# Altium PCB PCB3.PcbDoc
Units mil, origin at the board's own origin, x right, y up, seen from the top; angles counter-clockwise.
Board outline 1655 x 2290 mil, 2 copper layers (Top Layer, Bottom Layer); 19 components, 11 nets, 40 pads, 0 vias.
Unrouted connection lines stored in the file: 10.
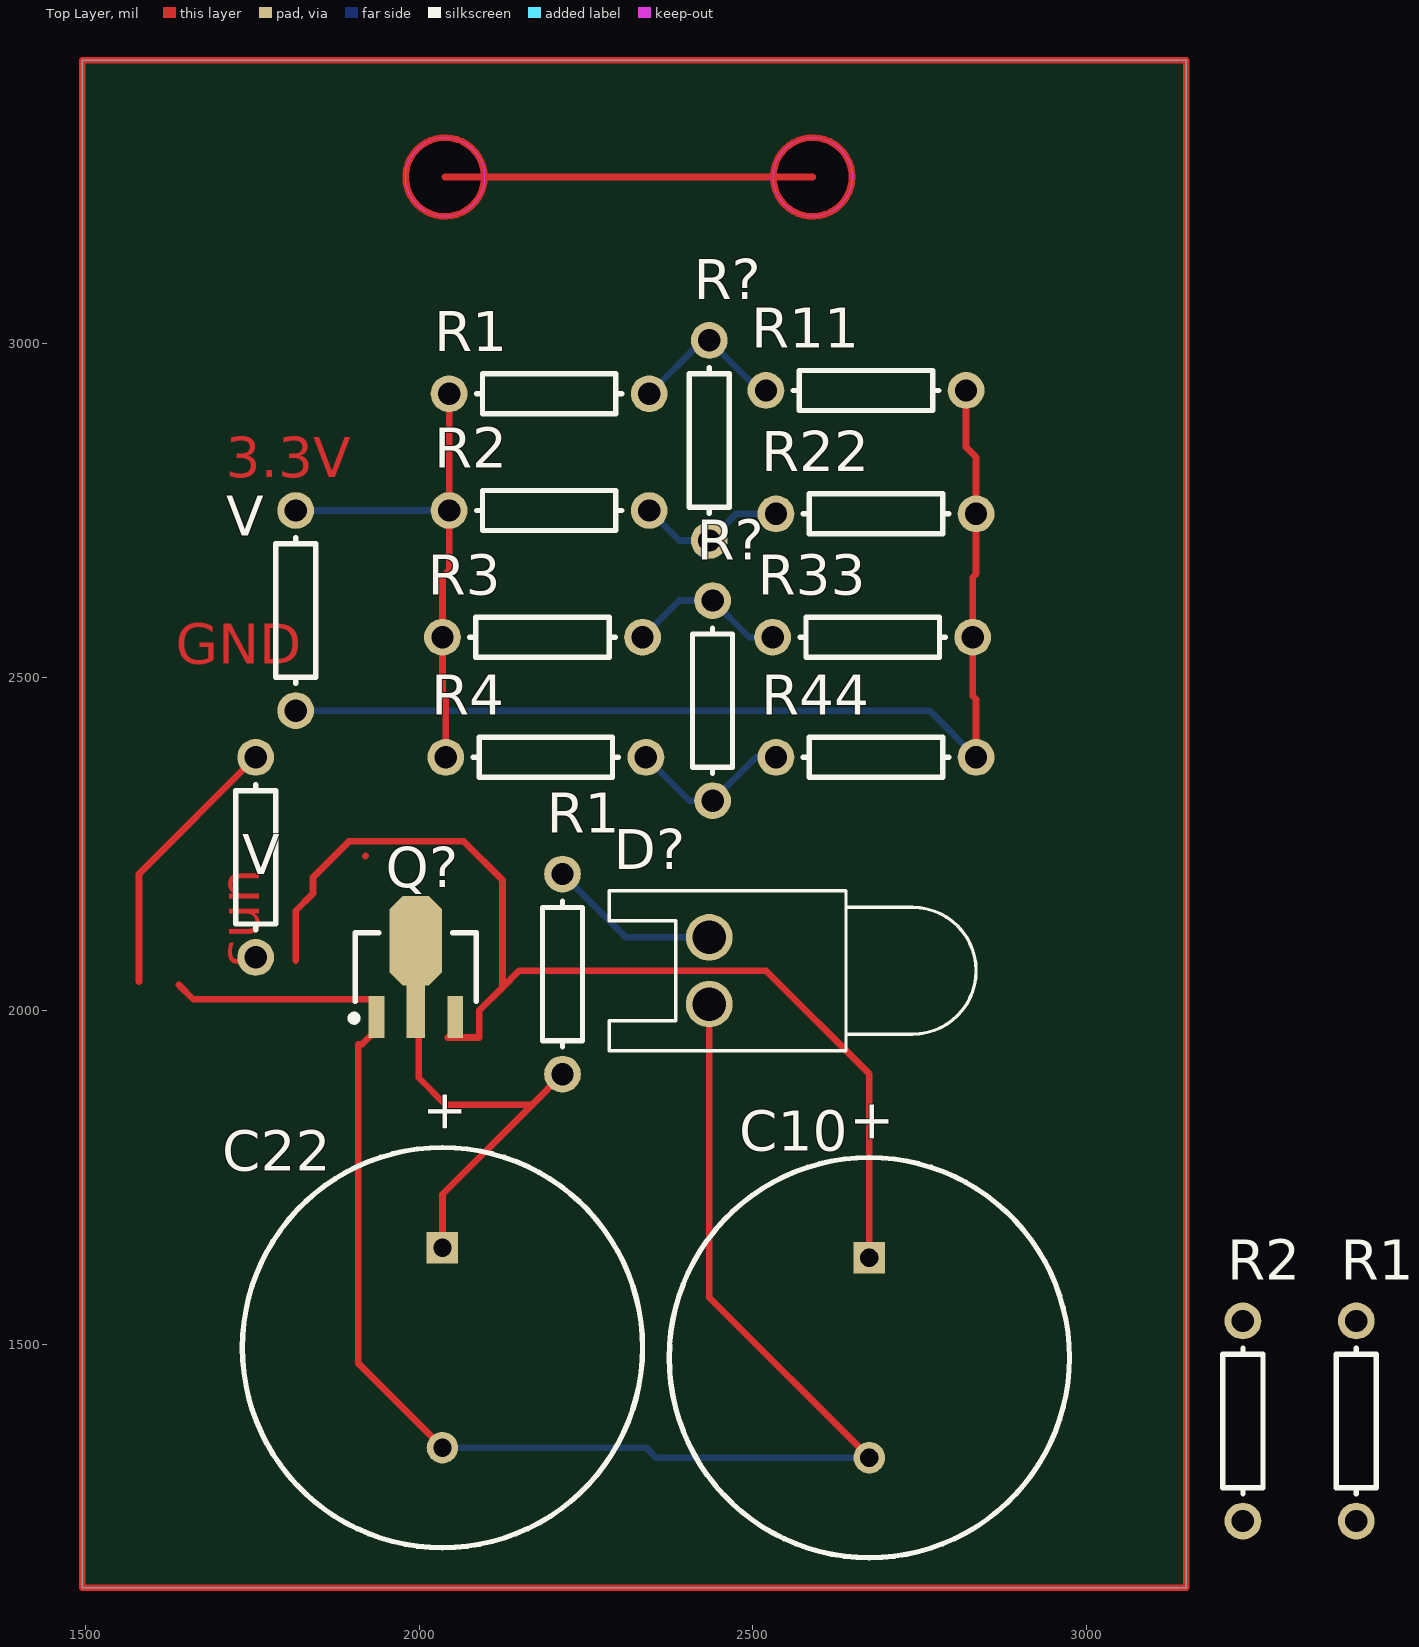
[diagram p0: Top Layer view]
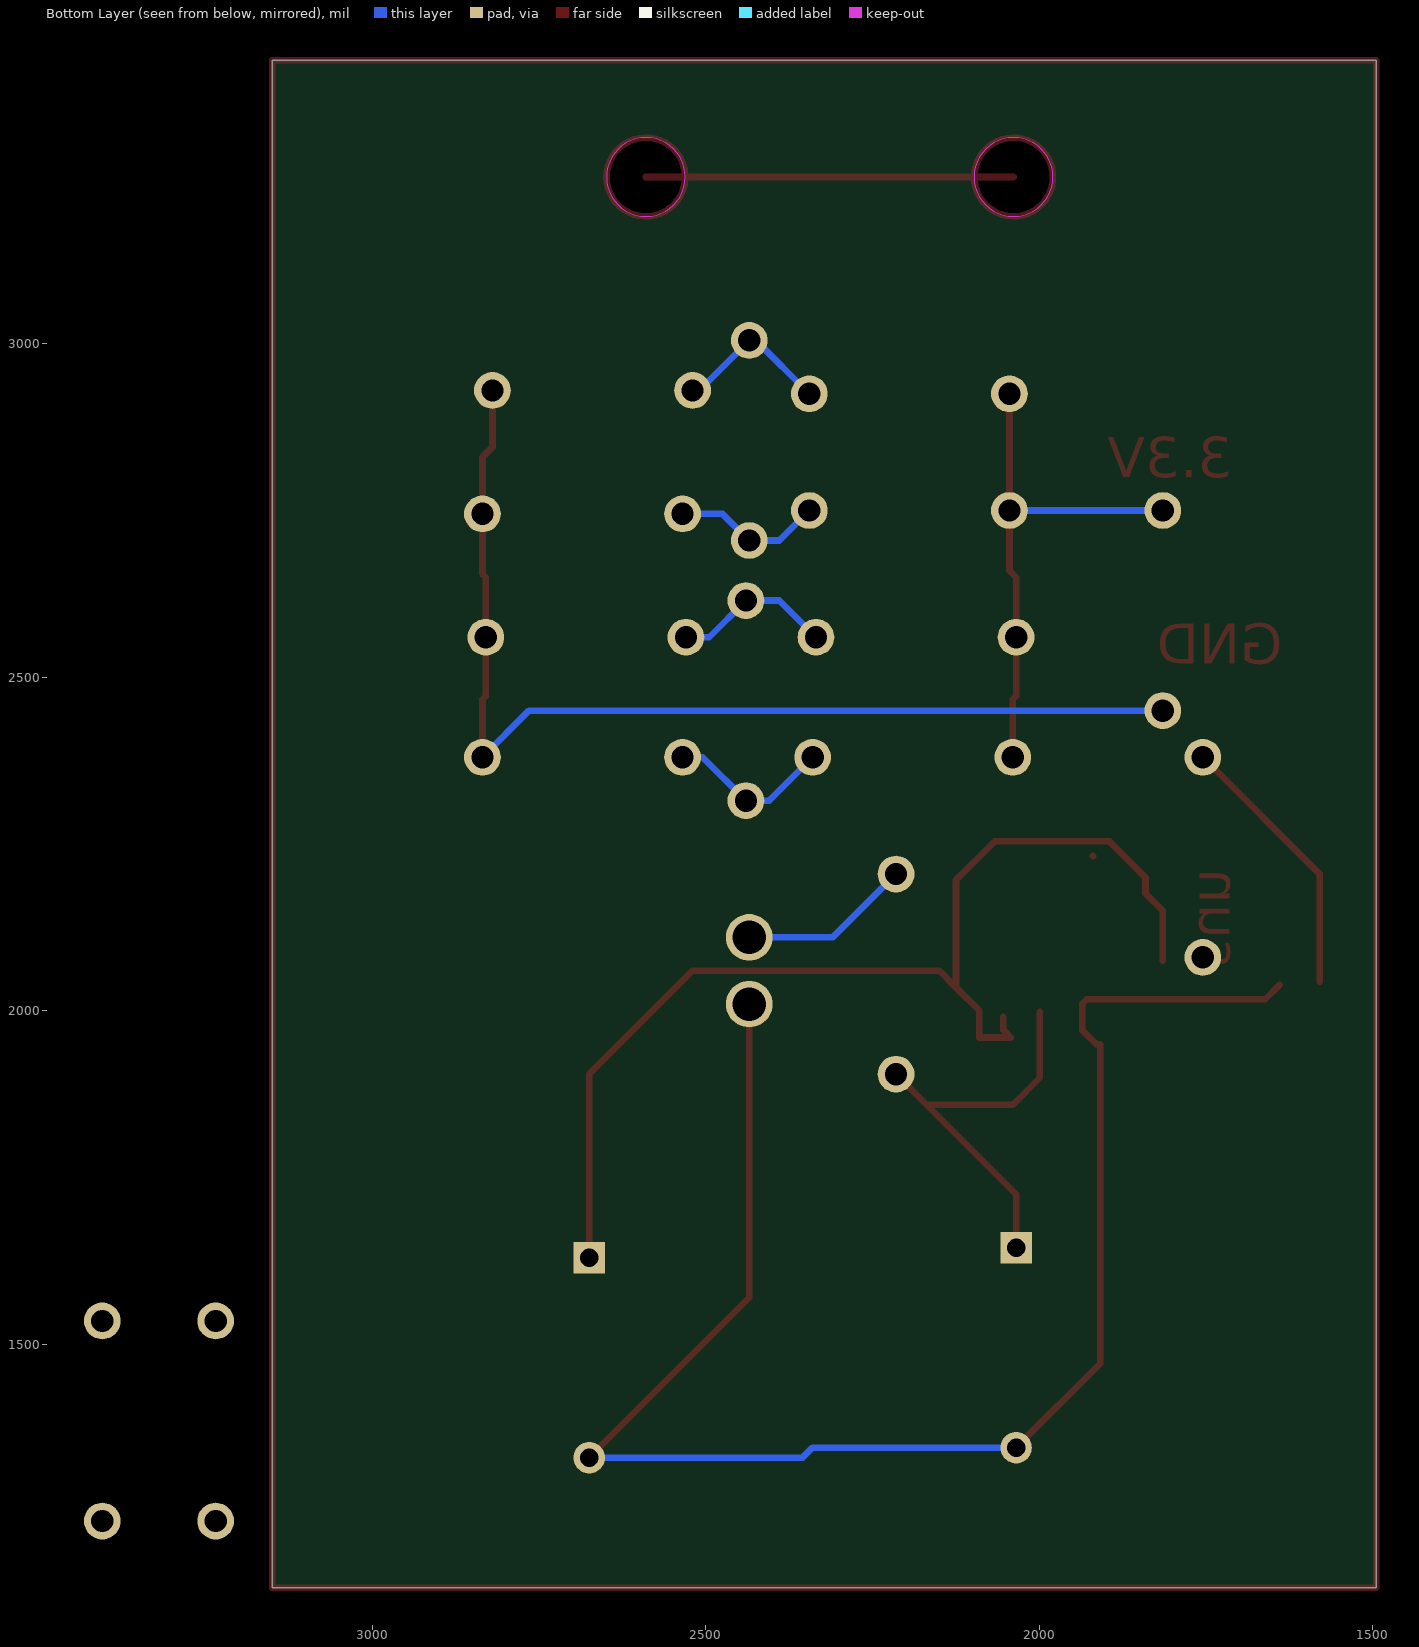
[diagram p1: Bottom Layer view, seen from below]

## Layer stack, top to bottom
Top Solder: solder mask 0.4, Solder Resist, Dk 3.5
Top Layer: signal copper 1.4
Dielectric 1: dielectric 12.6, FR-4, Dk 4.8
Bottom Layer: signal copper 1.4
Bottom Solder: solder mask 0.4, Solder Resist, Dk 3.5

## Board outline
1495,1135 3150,1135 3150,3425 1495,3425
cut-out: 2649.05,3250 cw(c2590,3250) 2590,3190.95 cw(c2590,3250) 2530.95,3250 cw(c2590,3250) 2590,3309.05 cw(c2590,3250)
cut-out: 2097.87,3250 cw(c2038.82,3250) 2038.82,3190.95 cw(c2038.82,3250) 1979.77,3250 cw(c2038.82,3250) 2038.82,3309.05 cw(c2038.82,3250)

## Design rules (kind name [scope] priority, off if disabled: settings)
Clearance [All] p1 off: gap=10 ignorepadtopadclearanceinfootprint=FALSE except(0: Arc-Hole Track-Hole SMDPad-Hole THPad-Hole Via-Hole Fill-Hole Poly-Hole Region-Hole Text-Hole)
PolygonConnect [All] p1: connectstyle=Relief reliefconductorwidth=10 reliefentries=4 polygonreliefangle="90 Angle" airgapwidth=10
RoomDefinition Sheet2 [InComponentClass('Sheet2')] p1: confinementstyle=ConfineIn formatcopy=TRUE lockcomponents=FALSE outline 3195,1195 3480,1195 3480,1675 3195,1675
RoomDefinition Sheet1 [InComponentClass('Sheet1')] p2: confinementstyle=ConfineIn formatcopy=TRUE lockcomponents=FALSE outline 3195,1195 3480,1195 3480,1675 3195,1675
RoutingVias [All] p1: holewidth=28 width=50 viastyle="Through Hole" minholewidth=28 minwidth=50 maxholewidth=28 maxwidth=50
ShortCircuit [All] p1 off: allowed=FALSE
SolderMaskExpansion [All] p1: expansion=4 istentingtop=FALSE
UnRoutedNet [All] p1 off:
Width [All] p1 off: maxlimit=10 minlimit=10 preferedwidth=10
28 further rules are at their usual default settings.

## Classes and differential pairs
component class Sheet2: C10 C22 D? Q? R1 R2 V
component class Sheet1: R1 R2 R3 R4 R11 R22 R33 R44 R? V

## Components (designator, comment, footprint, x,y, rotation, side; value= is the part's Value field where it differs from the comment)
C10 "Cap Pol1" RB7.6-15 2675,1480 r90 top value=10uF
C22 "Cap Pol1" RB7.6-15 2035,1495 r90 top value=22uF
D? "LED0" LED-0 2435,2060 r90 top
Q? "Diac-PNP" SOT89M 1995,2065.63 r90 top
R1 "Res1" AXIAL-0.3 3405,1385 r90 top value=1K
R1 "Res1" AXIAL-0.3 2215,2055 r270 top value=1K
R1 "Res1" AXIAL-0.3 2195,2925 r0 top value=1K
R2 "Res1" AXIAL-0.3 3235,1385 r90 top value=1K
R2 "Res1" AXIAL-0.3 2195,2750 r0 top value=1K
R3 "Res1" AXIAL-0.3 2185,2560 r0 top value=1K
R4 "Res1" AXIAL-0.3 2190,2380 r0 top value=1K
R11 "Res1" AXIAL-0.3 2670,2930 r0 top value=1K
R22 "Res1" AXIAL-0.3 2685,2745 r0 top value=1K
R33 "Res1" AXIAL-0.3 2680,2560 r0 top value=1K
R44 "Res1" AXIAL-0.3 2685,2380 r0 top value=1K
R? "Res1" AXIAL-0.3 2435,2855 r90 top value=1K
R? "Res1" AXIAL-0.3 2440,2465 r90 top value=1K
V "Res1" AXIAL-0.3 1755,2230 r90 top value=1K
V "Res1" AXIAL-0.3 1815,2600 r90 top value=1K

## Footprints (in the part's own frame and the unit in brackets; to place one, negate y for a bottom-side part, rotate by r counter-clockwise, add the part's x,y. Pads: shape width x height; smd on the part's side, far side on the other; paste and mask are expansions set on the pad)
AXIAL-0.3 [mm] "Axial Device, Thru-Hole; 2 Leads; 0.3 in Pin Spacing"
  round 1.4 hole 0.85: 1(-3.81,0) 2(3.81,0)
  silkscreen extent -2.77,-0.76 2.77,0.76
LED-0 [mil] "LED; 2 Leads"
  round 70 hole 50: 1(50,0) 2(-50,0)
  silkscreen extent -120,-400 120,150
RB7.6-15 [mm] "Polarized Capacitor (Radial); 2 Leads"
  rect 1.2x1.2 hole 0.7: 1(3.81,0)
  round 1.2 hole 0.7: 2(-3.81,0)
  silkscreen extent -7.62,-7.62 7.62,7.62
SOT89M [mm] "SOT89, 3-Leads, Body 4.5x2.4 mm, Pitch 1.5mm, Lead Span 4.1mm, IPC Low Density"
  rect 1.6x0.6 smd: 1(-1.9,1.5) 3(-1.9,-1.5)
  rect 2x0.7 smd: 2(-1.7,0)
  oct 3.4x2 smd: 2(1,0)
  silkscreen extent -2.07,-2.3 1.3,2.47, body extent -1.3,-2.3 1.3,2.3, height 1.6

## Part data
C10 C22: "Polarized Capacitor (Radial)", LatestRevisionDate=17-Jul-2002, LatestRevisionNote="Re-released for DXP Platform.", PackageDescription="Polarized Capacitor (Radial); 2 Leads", PackageReference=RB7.6-15, Published=8-Jun-2000, Publisher="Altium Limited"
D?: "Typical INFRARED GaAs LED", LatestRevisionDate=08-Jul-2005, LatestRevisionNote="Mech Layer 1 removed.", PackageDescription="LED; 2 Leads", PackageReference=LED-0, Published=8-Jun-2000, Publisher="Altium Limited"
Q?: "DIAC", Code_JEDEC=TO-243-AA, LatestRevisionDate=29-May-2009, LatestRevisionNote="IPC-7351 Footprint Added.", PackageDescription="3-Pin SOT-89 Package 1.5 mm Pitch, 4.1 mm Lead Span", PackageReference=SOT89, PackageVersion=Jul-2004, Published=24-Mar-1999, Publisher="Altium Limited"
R1 R1 R1 R2 R2 R3 R4 R11 R22 R33 R44 R? R? V V: "Resistor", LatestRevisionDate=17-Jul-2002, LatestRevisionNote="Re-released for DXP Platform.", PackageDescription="Axial Device, Thru-Hole; 2 Leads; 0.3 in Pin Spacing", PackageReference=AXIAL-0.3, Published=8-Jun-2000, Publisher="Altium Limited"

## Nets (pads, with @x,y where several pads share a name; then routed paths per layer and width w, separated by ;. In a path a pad name is that pad's centre, name@x,y a point inside that pad or via, vN(x,y) a via of type N, cw(c..) or ccw(c..) an arc to the next point about the centre after c; other vN are vias at no path point)
NetC10_1: C10.1 Q?.3 V.1@1755,2080 | length 1698.7
  Top Layer w10: 1815,2075 1815,2150 1841,2176 1841,2200 1895,2254 2067,2254 2125,2196 2125,2035 ; Q?.3 2054.06,1971.14 2042.91,1960 2090,1960 2090,2000 2125,2035 ; C10.1 2675,1905 2520,2060 2150,2060 2125,2035
NetC10_2: C10.2 C22.2 D?.2 R2.1@3235,1235 V.2@1755,2380 | length 2492.2
  Top Layer w10: 1580,2043.79 1580,2205 V.2@1755,2380 ; 1908.9,1950 1908.9,1471.1 C22.2 ; 1919.49,2231.8 1919.95,2232.26 ; D?.2 2435,1570 C10.2
  Bottom Layer w10: C22.2 2340,1345 2355,1330 C10.2
NetC22_1: C22.1 Q?.2 R1.1@2215,2205 R1.2@3405,1535
NetD?_1: D?.1 R1.2@2215,1905 | length 259.4
  Bottom Layer w10: 2215,2205 2310,2110 D?.1
NetQ?_1: Q?.1 R1.1@3405,1235 R2.2@3235,1535
NetR1_1: R1.1@2045,2925 R2.1@2045,2750 R3.1 R4.1 V.2@1815,2750 | length 781.2
  Top Layer w10: R4.1 2040,2467 2035,2472 R3.1 2035,2650 2045,2660 2045,2750 R1.1@2045,2925
  Bottom Layer w10: V.2@1815,2750 R2.1@2045,2750
NetR1_2: R1.2@2345,2925 R11.1 R?.2@2435,3005 | length 239.2
  Bottom Layer w10: R1.2@2345,2925 2425,3005 2435,3005 2510,2930 R11.1
NetR2_2: R2.2@2345,2750 R22.1 R?.1@2435,2705 | length 225.2
  Bottom Layer w10: R2.2@2345,2750 2390,2705 2435,2705 2475,2745 R22.1
NetR3_2: R3.2 R33.1 R?.2@2440,2615 | length 240.6
  Bottom Layer w10: R3.2 2390,2615 2440,2615 2495,2560 R33.1
NetR4_2: R4.2 R44.1 R?.1@2440,2315 | length 248.8
  Bottom Layer w10: R4.2 2405,2315 2440,2315 2505,2380 R44.1
NetR11_2: R11.2 R22.2 R33.2 R44.2 V.1@1815,2450 | length 1633.8
  Top Layer w10: V.1@1794.16,2441.37 1802.79,2450 V.1@1815,2450 ; R11.2 2820,2845 2835,2830 R22.2 2835,2655 2830,2650 R33.2 2830,2472 2835,2467 R44.2
  Bottom Layer w10: V.1@1815,2450 2765,2450 R44.2
copper on no net: | length 11631.1
  Top Layer w10: 1610,1135 3055,1135 ; 1640,2038.79 1661.46,2017.32 1929.13,2017.32 1935.94,2010.51 1935.94,1990.83 1935.94,1971.14 1914.8,1950 1908.9,1950 ; 1999.45,1998.7 1999.45,1899.55 2040,1859 2169,1859 ; 2035,1645 2035,1725 2169,1859 ; 2038.82,3250 2590,3250 ; 2215,1905 2169,1859 ; 1495,1135 3150,1135 3150,3425 1495,3425 1495,1135 ; 2097.87,3250 ccw(c2038.82,3250) 2097.87,3250 ; 2649.05,3250 ccw(c2590,3250) 2649.05,3250

## Other copper
Top Layer:
  text "3.3V" at 1710,2800 h60
  text "GND" at 1635,2520 h60
  text "sun" at 1760,2065 h60 r90

## Text inside footprints (layer, text, board x,y; h text height)
C10: Top Overlay "+" at 2704.01,1800.15 h59.06 r90
C22: Top Overlay "+" at 2064.01,1815.15 h59.06 r90